# Altium PCB PCB1.PcbDoc
Units mm, origin at the board's own origin, x right, y up, seen from the top; angles counter-clockwise.
Board outline 100.08 x 99.57 mm, 2 copper layers (Top Layer, Bottom Layer); 120 components, 92 nets, 380 pads, 70 vias.
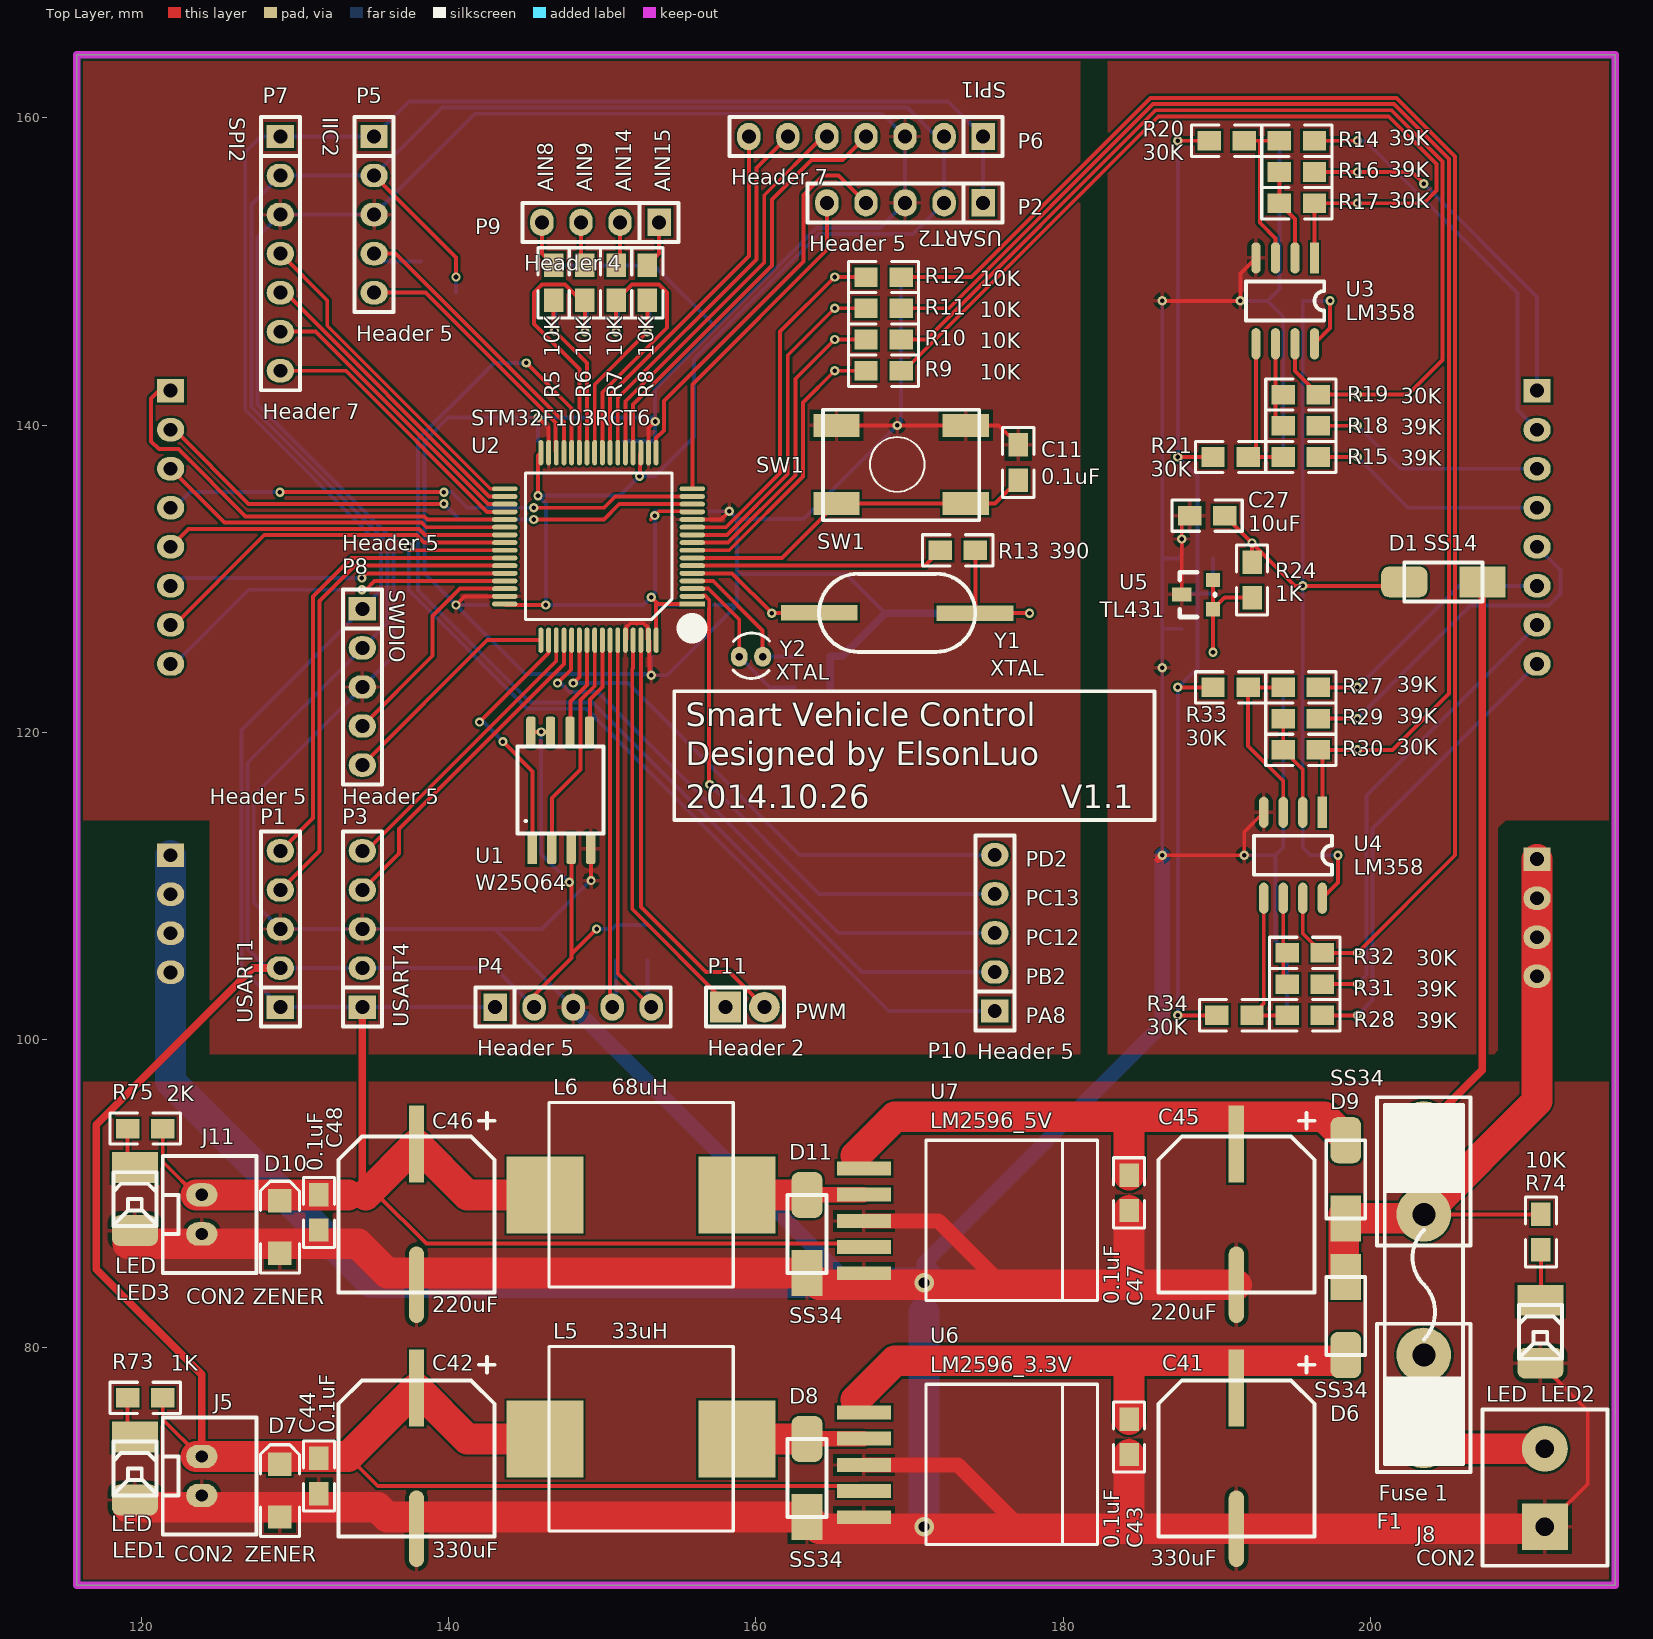
[diagram p0: Top Layer view]
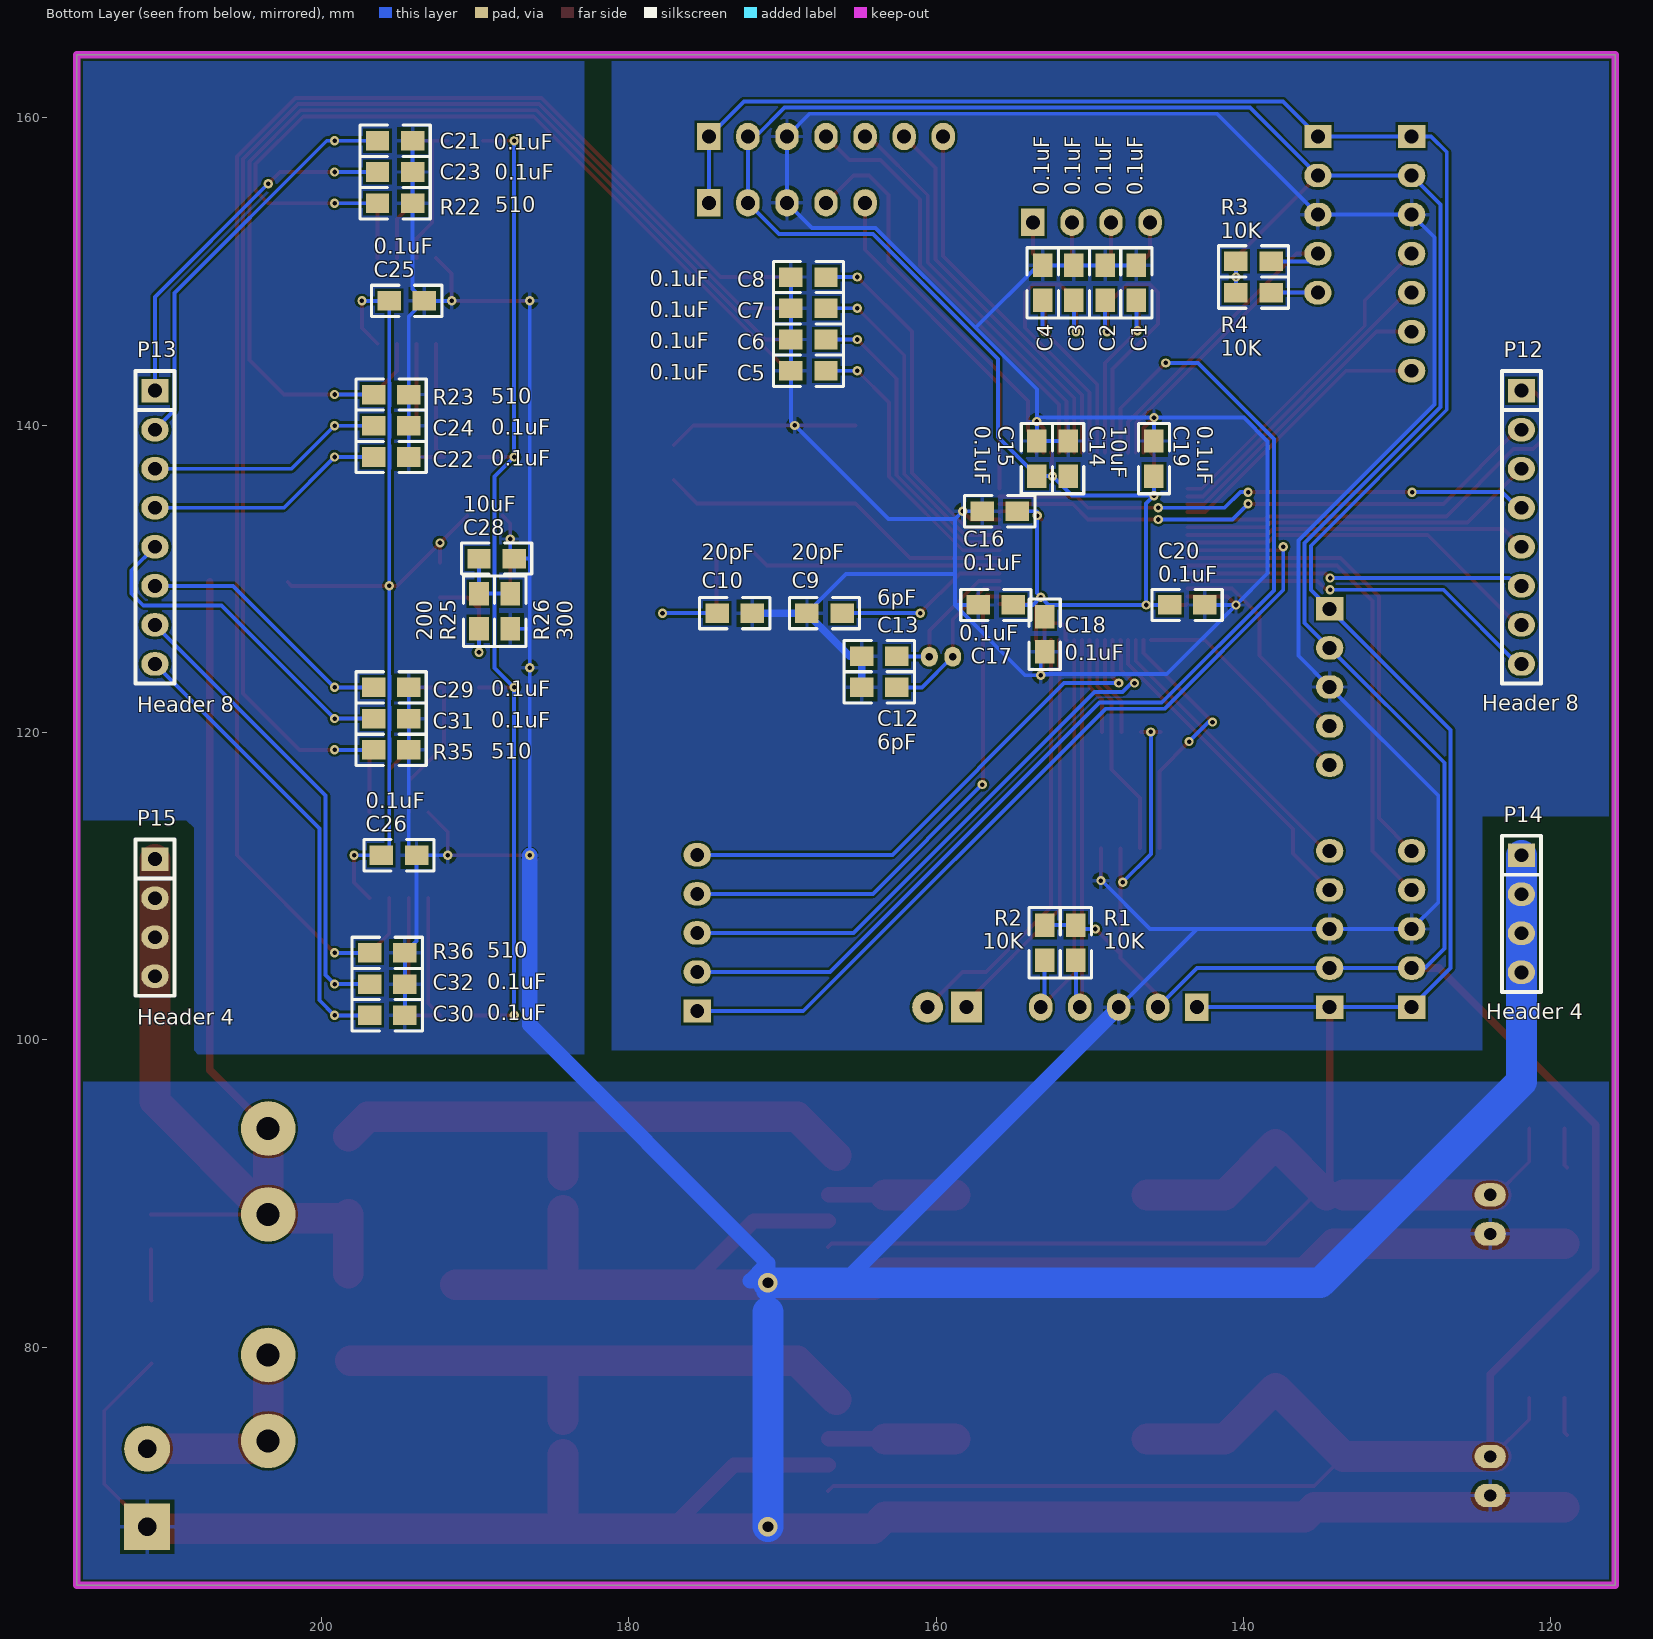
[diagram p1: Bottom Layer view, seen from below]
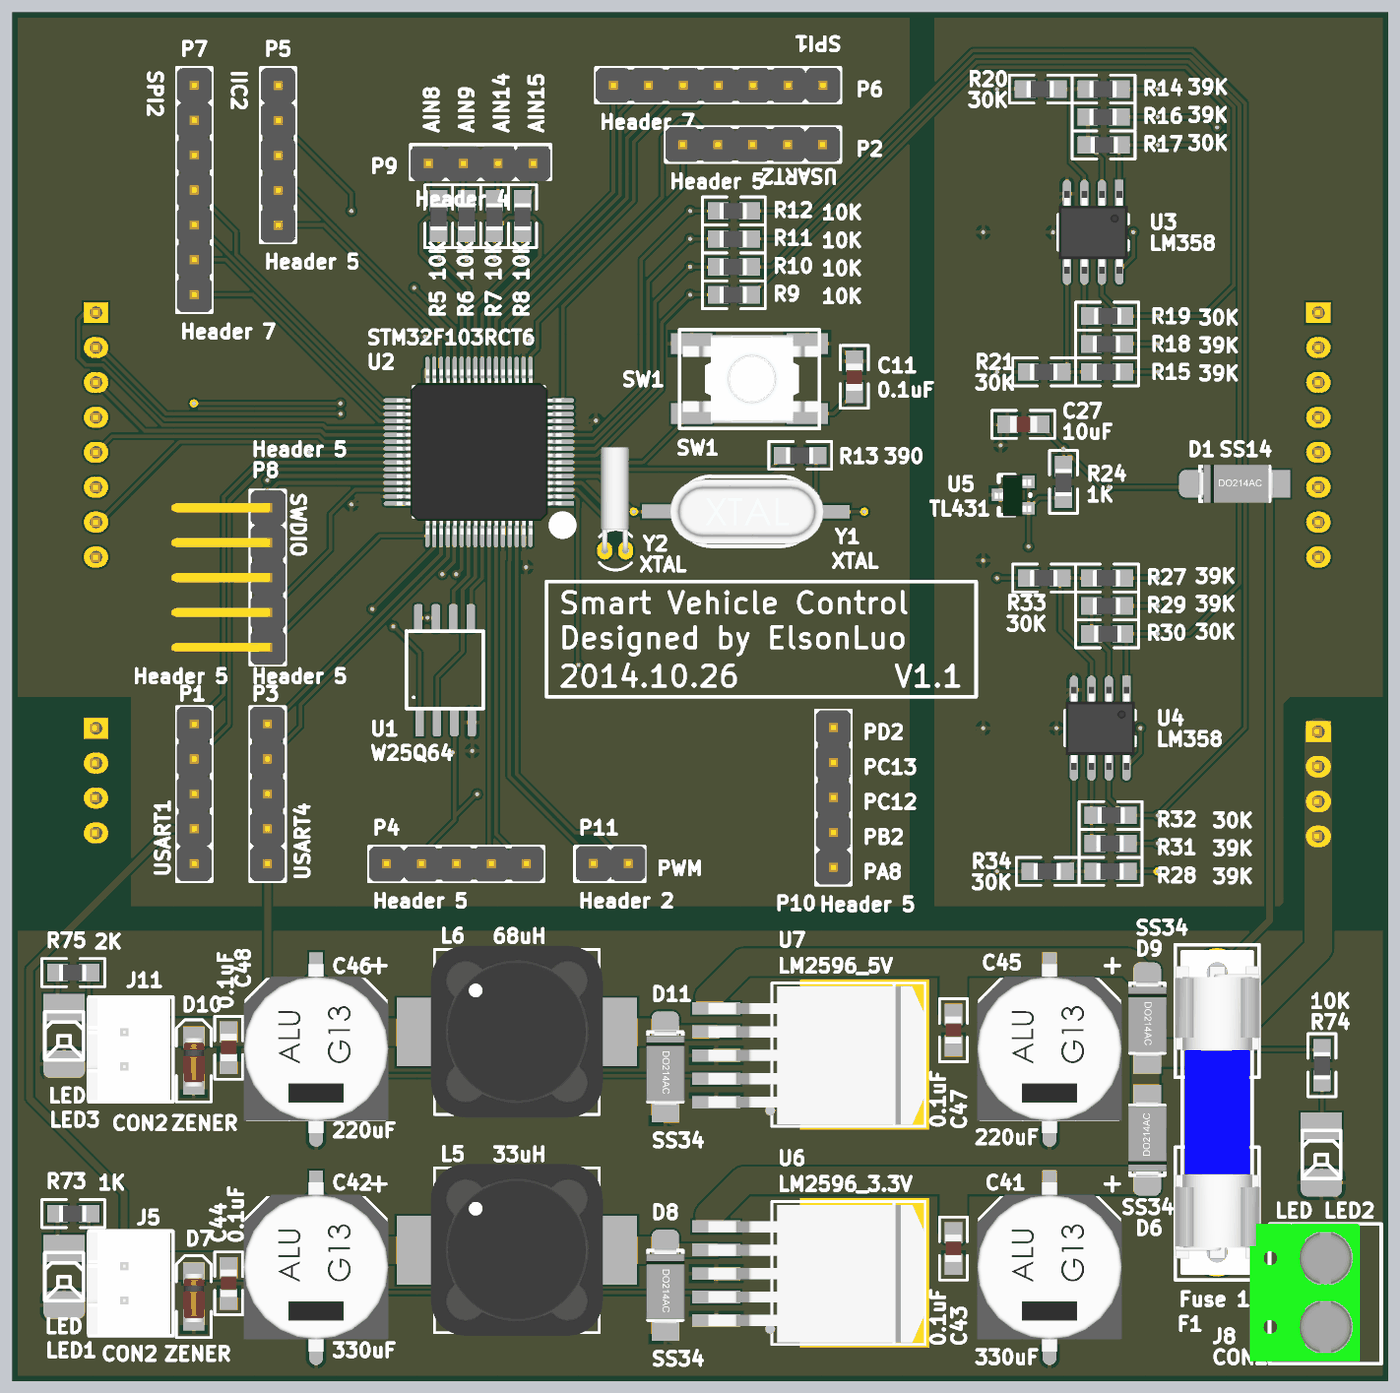
[diagram p2: 3D render of the assembled board from above, using the file's embedded part models]
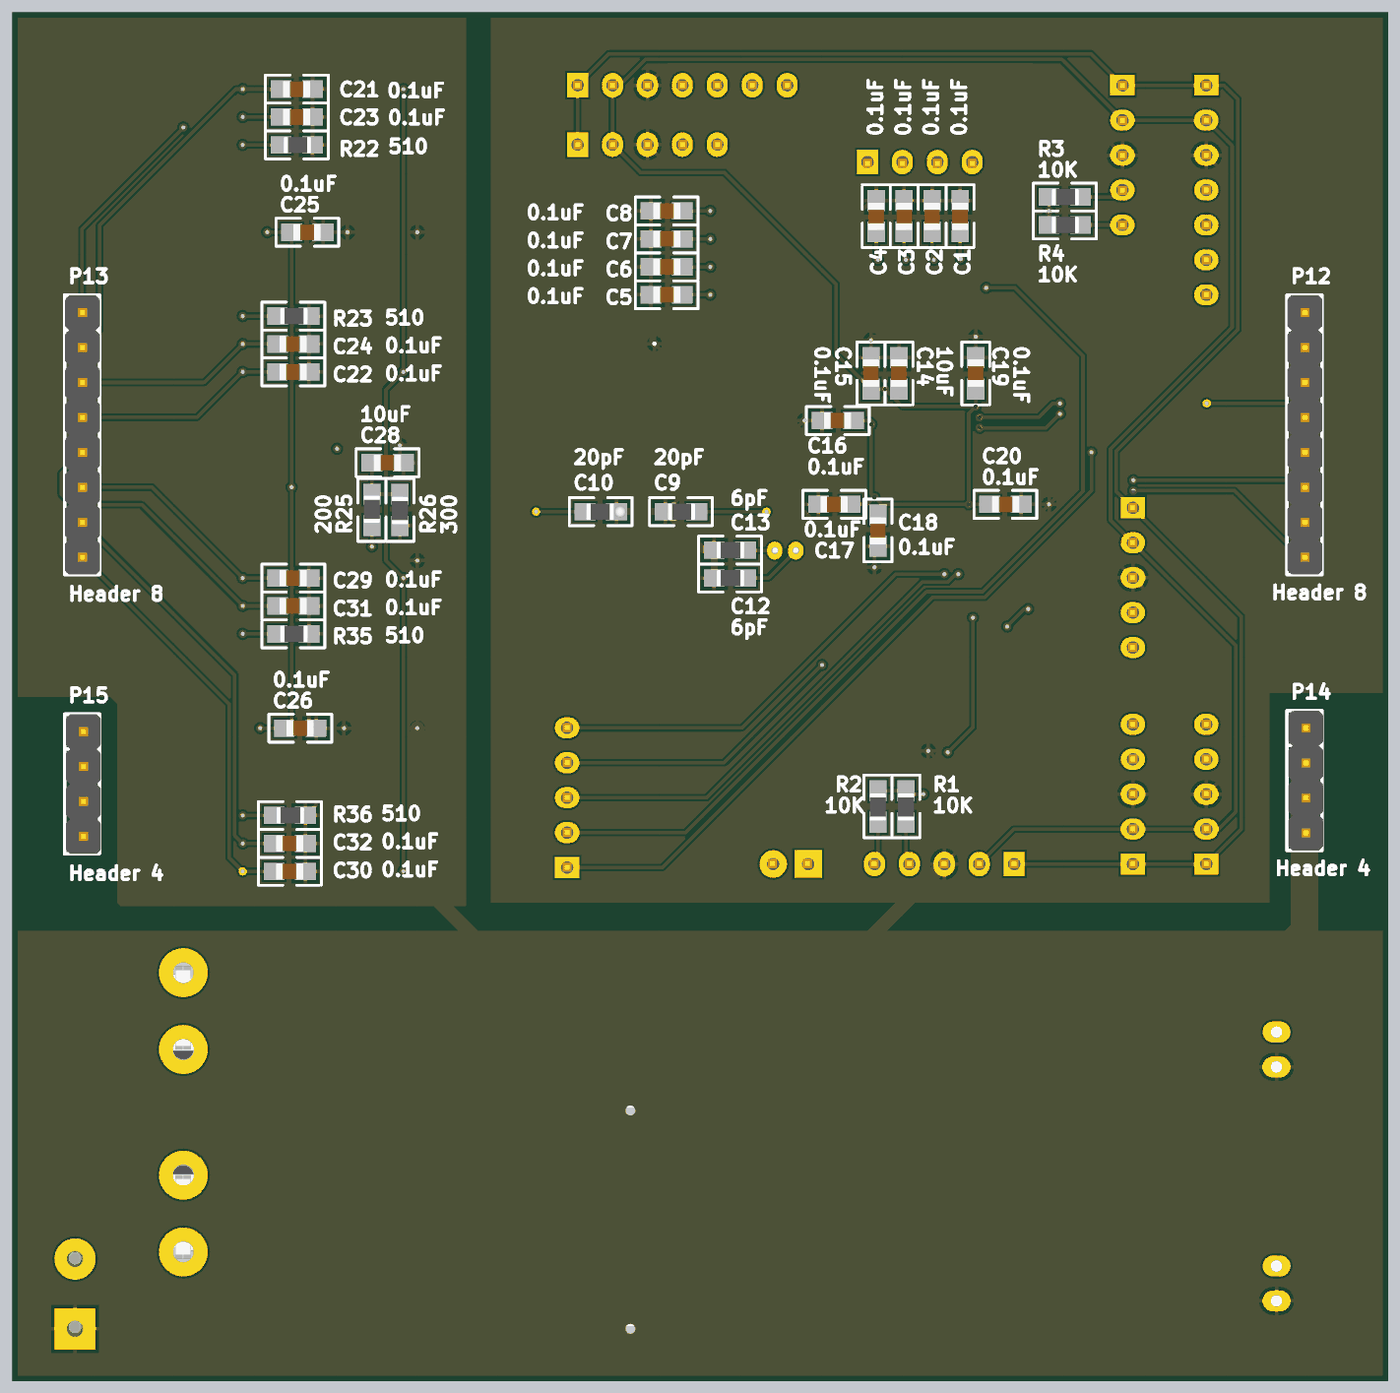
[diagram p3: 3D render of the assembled board from below, using the file's embedded part models]

## Layer stack, top to bottom
Top Solder: solder mask 0.0102, Solder Resist, Dk 3.5
Top Layer: signal copper 0.0356
Dielectric1: dielectric 0.32, FR-4, Dk 4.8
Bottom Layer: signal copper 0.0356
Bottom Solder: solder mask 0.0102, Solder Resist, Dk 3.5

## Board outline
115.824,64.516 215.9,64.516 215.9,164.084 115.824,164.084

## Design rules (kind name [scope] priority, off if disabled: settings)
Clearance [All] p1: gap=0.15
ComponentClearance [All] p1 off: gap=0.254 collisioncheckmode=3 verticalgap=0.254 showdistances=FALSE
PolygonConnect [All] p1: connectstyle=Relief reliefconductorwidth=0.254 reliefentries=4 polygonreliefangle="90 Angle" airgapwidth=0.254
RoomDefinition "power supply" [InComponentClass('power supply')] p1: confinementstyle=ConfineIn formatcopy=TRUE lockcomponents=FALSE outline 117.602,65.024 215.646,65.024 215.646,97.282 117.602,97.282
RoomDefinition mcu [InComponentClass('mcu')] p2: confinementstyle=ConfineIn formatcopy=TRUE lockcomponents=FALSE outline 179.354,162.077 117.602,162.077 117.602,99.085 179.354,99.085
RoomDefinition analog [InComponentClass('analog')] p3: confinementstyle=ConfineIn formatcopy=TRUE lockcomponents=FALSE outline 185.166,160.782 185.166,99.06 213.868,99.06 213.868,160.782
RoutingVias [All] p1: holewidth=0.3 width=0.6 viastyle="Through Hole" minholewidth=0.3 minwidth=0.6 maxholewidth=0.3 maxwidth=0.6
SMDNeckDown [All] p1 off: percent=80.000
SilkToSolderMaskClearance SilkscreenOverComponentPads [IsPad] p1: minsilkscreentomaskgap=0.254 clearancetoexposedcopper=TRUE
SolderMaskExpansion [All] p1: expansion=0.02
Width Width_2 [InNet('GND')] p1: maxlimit=2 minlimit=0.254 preferedwidth=0.254
Width Width_1 [InNet('VCC')] p2: maxlimit=2 minlimit=0.254 preferedwidth=0.254
Width [All] p3: maxlimit=5 minlimit=0.15 preferedwidth=0.15
27 further rules are at their usual default settings.

## Classes and differential pairs
component class "power supply": C41 C42 C43 C44 C45 C46 C47 C48 D6 D7 D8 D9 D10 D11 F1 J5 J8 J11 L5 L6 LED1 LED2 LED3 R73 R74 R75 U6 U7
component class mcu: C1 C2 C3 C4 C5 C6 C7 C8 C9 C10 C11 C12 C13 C14 C15 C16 C17 C18 C19 C20 P1 P2 P3 P4 P5 P6 P7 P8 P9 P10 P11 P12 P14 R1 R2 R3 R4 R5 R6 R7 R8 R9 R10 R11 R12 R13 SW1 U1 U2 Y1 Y2
component class analog: C21 C22 C23 C24 C25 C26 C27 C28 C29 C30 C31 C32 D1 P13 P15 R14 R15 R16 R17 R18 R19 R20 R21 R22 R23 R24 R25 R26 R27 R28 R29 R30 R31 R32 R33 R34 R35 R36 U3 U4 U5

## Components (designator, comment, footprint, x,y, rotation, side; value= is the part's Value field where it differs from the comment)
C1 "0.1uF" "0805 CAP" 146.969,148.107 r90 bottom
C2 "0.1uF" "0805 CAP" 149.001,148.107 r90 bottom
C3 "0.1uF" "0805 CAP" 151.033,148.107 r90 bottom
C4 "0.1uF" "0805 CAP" 153.065,148.107 r90 bottom
C5 "0.1uF" "0805 CAP" 167.162,143.535 r0 bottom
C6 "0.1uF" "0805 CAP" 167.162,145.567 r0 bottom
C7 "0.1uF" "0805 CAP" 167.162,147.599 r0 bottom
C8 "0.1uF" "0805 CAP" 167.162,149.631 r0 bottom
C9 "20pF" 0805 166.116,127.762 r0 bottom
C10 "20pF" 0805 174.244,127.762 r180 bottom
C11 "0.1uF" "0805 CAP" 177.068,136.423 r90 top
C12 "6pF" 0805 162.56,122.936 r0 bottom
C13 "6pF" 0805 162.56,124.968 r0 bottom
C14 "10uF" "0805 CAP" 151.414,138.963 r270 bottom
C15 "0.1uF" "0805 CAP" 153.446,138.963 r270 bottom
C16 "0.1uF" "0805 CAP" 157.002,134.391 r180 bottom
C17 "0.1uF" "0805 CAP" 157.256,128.295 r180 bottom
C18 "0.1uF" "0805 CAP" 152.938,125.247 r90 bottom
C19 "0.1uF" "0805 CAP" 145.826,138.963 r270 bottom
C20 "0.1uF" "0805 CAP" 142.524,128.295 r0 bottom
C21 "0.1uF" "0805 CAP" 196.342,158.496 r180 bottom
C22 "0.1uF" "0805 CAP" 196.596,137.922 r180 bottom
C23 "0.1uF" "0805 CAP" 196.342,156.464 r180 bottom
C24 "0.1uF" "0805 CAP" 196.596,139.954 r180 bottom
C25 "0.1uF" "0805 CAP" 195.58,148.082 r180 bottom
C26 "0.1uF" "0805 CAP" 196.088,112.014 r180 bottom
C27 "10uF" "0805 CAP" 190.5,134.112 r180 top
C28 "10uF" "0805 CAP" 189.738,131.318 r180 bottom
C29 "0.1uF" "0805 CAP" 196.596,122.936 r180 bottom
C30 "0.1uF" "0805 CAP" 196.85,101.6 r180 bottom
C31 "0.1uF" "0805 CAP" 196.596,120.904 r180 bottom
C32 "0.1uF" "0805 CAP" 196.85,103.632 r180 bottom
C41 "330uF" "RVT 220uF" 191.262,72.771 r270 top
C42 "330uF" "RVT 220uF" 137.922,72.771 r270 top
C43 "0.1uF" "0805 CAP" 184.277,75.311 r270 top
C44 "0.1uF" "0805 CAP" 131.572,72.771 r270 top
C45 "220uF" "RVT 220uF" 191.262,88.646 r270 top
C46 "220uF" "RVT 220uF" 137.922,88.646 r270 top
C47 "0.1uF" "0805 CAP" 184.277,91.186 r270 top
C48 "0.1uF" "0805 CAP" 131.572,89.916 r270 top
D1 "SS14" DO-241AC 204.724,129.794 r180 top
D6 "SS34" DO-241AC 198.374,82.042 r270 top
D7 "ZENER" "1206 DIODE" 129.032,68.961 r90 top
D8 "SS34" DO-241AC 163.322,71.501 r90 top
D9 "SS34" DO-241AC 198.374,90.932 r90 top
D10 "ZENER" "1206 DIODE" 129.032,86.106 r90 top
D11 "SS34" DO-241AC 163.322,87.376 r90 top
F1 "Fuse 1" FUSE1 203.454,84.074 r90 top
J5 "CON2" DG1282 114.808,75.438 r270 top
J8 "CON2" con2 211.328,70.866 r90 top
J11 "CON2" DG1282 114.808,92.456 r270 top
L5 "33uH" 12x12 152.527,74.041 r0 top
L6 "68uH" 12x12 152.527,89.916 r0 top
LED1 "LED" "3528 led" 120.396,70.866 r180 top
LED2 "LED" "3528 LED" 211.836,79.756 r180 top
LED3 "LED" "3528 led" 120.396,88.392 r180 top
P1 "Header 5" "sip5 i" 129.062,102.133 r90 top
P2 "Header 5" "sip5 i" 174.782,154.457 r180 top
P3 "Header 5" "sip5 i" 134.396,102.133 r90 top
P4 "Header 5" "sip5 i" 143.032,102.133 r0 top
P5 "Header 5" "sip5 i" 135.158,158.775 r270 top
P6 "Header 7" "sip7 i" 174.782,158.775 r180 top
P7 "Header 7" "sip7 i" 129.062,158.775 r270 top
P8 "Header 5" "sip5 l" 134.396,128.041 r270 top
P9 "Header 4" "sip4 i" 149.89,153.187 r180 top
P10 "Header 5" "sip5 i" 175.544,101.879 r90 top
P11 "Header 2" "sip2 i" 159.288,102.133 r0 top
P12 "Header 8" "sip8 i" 121.92,142.24 r270 bottom
P13 "Header 8" "sip8 i" 210.82,142.24 r270 bottom
P14 "Header 4" "sip4 i" 121.92,108.204 r270 bottom
P15 "Header 4" "sip4 i" 210.82,107.95 r270 bottom
R1 "10K" 0805 150.906,105.181 r90 bottom
R2 "10K" 0805 152.938,105.181 r90 bottom
R3 "10K" 0805 138.206,150.647 r0 bottom
R4 "10K" 0805 138.206,148.615 r0 bottom
R5 "10K" 0805 146.842,148.107 r90 top
R6 "10K" 0805 148.874,148.107 r90 top
R7 "10K" 0805 150.906,148.107 r90 top
R8 "10K" 0805 152.938,148.107 r90 top
R9 "10K" 0805 167.162,143.535 r0 top
R10 "10K" 0805 167.162,145.567 r0 top
R11 "10K" 0805 167.162,147.599 r0 top
R12 "10K" 0805 167.162,149.631 r0 top
R13 "390" 0805 171.988,131.851 r0 top
R14 "39K" 0805 194.056,158.496 r0 top
R15 "39K" 0805 194.31,137.922 r0 top
R16 "39K" 0805 194.056,156.464 r0 top
R17 "30K" 0805 196.342,154.432 r180 top
R18 "39K" 0805 194.31,139.954 r0 top
R19 "30K" 0805 196.596,141.986 r180 top
R20 "30K" 0805 189.484,158.496 r0 top
R21 "30K" 0805 189.738,137.922 r0 top
R22 "510" 0805 194.056,154.432 r0 bottom
R23 "510" 0805 194.31,141.986 r0 bottom
R24 "1K" 0805 192.278,128.778 r90 top
R25 "200" 0805 189.738,129.032 r270 bottom
R26 "300" 0805 187.706,126.746 r90 bottom
R27 "39K" 0805 194.31,122.936 r0 top
R28 "39K" 0805 194.564,101.6 r0 top
R29 "39K" 0805 194.31,120.904 r0 top
R30 "30K" 0805 196.596,118.872 r180 top
R31 "39K" 0805 194.564,103.632 r0 top
R32 "30K" 0805 196.85,105.664 r180 top
R33 "30K" 0805 189.738,122.936 r0 top
R34 "30K" 0805 189.992,101.6 r0 top
R35 "510" 0805 194.31,118.872 r0 bottom
R36 "510" 0805 194.564,105.664 r0 bottom
R73 "1K" 0805 119.126,76.708 r0 top
R74 "10K" 0805 211.074,86.36 r90 top
R75 "2K" 0805 119.126,94.234 r0 top
SW1 "SW1" "KEYA SMT" 174.02,133.883 r180 top
U1 "W25Q64" "so-8 fat" 147.066,113.03 r0 top
U2 "STM32F103RCT6" qfp64 149.763,132.105 r180 top
U3 "LM358" so-8 196.342,150.876 r270 top
U4 "LM358" so-8 196.85,114.808 r270 top
U5 "TL431" sot-23 187.706,129.032 r90 top
U6 "LM2596_3.3V" to-263-5 177.927,74.041 r270 top
U7 "LM2596_5V" to-263-5 177.927,89.916 r270 top
Y1 "XTAL" "XTAL SOT" 169.194,127.787 r0 top
Y2 "XTAL" "xtal 26" 159.766,124.206 r270 top

## Footprints (in the part's own frame and the unit in brackets; to place one, negate y for a bottom-side part, rotate by r counter-clockwise, add the part's x,y. Pads: shape width x height; smd on the part's side, far side on the other; paste and mask are expansions set on the pad)
12x12 [mm]
  rect 5x5 smd: 1(-6.25,0) 2(6.25,0)
  silkscreen extent -6,-6 6,6, body extent -6.25,-6.22 6.25,6.28, height 6.7
0805 [mil]
  rect 60x50 smd: 1(0,0) 2(90,0)
  silkscreen extent -45,-40 135,40, body extent 4,-24 83,24, height 20
"0805 CAP" [mil]
  rect 60x50 smd: 1(0,0) 2(90,0)
  silkscreen extent -45,-40 135,40, body extent 5,-24 84,24, height 37
"1206 DIODE" [mil]
  rect 60x60 smd: 1(0,0) 2(135,0)
  silkscreen extent -50,-50 185,50, body extent -6,-30 132,30, height 59
"3528 led" [mm]
  rect 3x2 smd paste+0: 1(0.8,-3.3)
  rrect50% 3x2 smd: 2(0.8,0.8)
  silkscreen extent -0.6,-3 2.2,0.5, body extent -0.7,-3.1 2.3,0.6, height 2.1
"3528 LED" [mm]
  rect 3x2 smd paste+0: 1(0.8,-3.3)
  rrect50% 3x2 smd: 2(0.8,0.8)
  silkscreen extent -0.6,-3 2.2,0.5, body extent -0.7,-3.1 2.3,0.6, height 2.1
con2 [mm]
  rect 3x3 hole 1.2: 1(-2.54,0)
  round 3 hole 1.2: 2(2.54,0)
  silkscreen extent -5.08,-4.06 5.08,4.06, body extent -4.9,-2.5 5.1,5.5, height 11
DG1282 [mil]
  oval 60x80 hole 31.5: 1(100,360) 2(200,360)
  silkscreen extent 0,260 300,500, body extent 4,253 295,493, height 283
DO-241AC [mm]
  rect 3x2 smd: 1(-2.54,0)
  rrect50% 3x2 smd: 2(2.54,0)
  silkscreen extent -2.54,-1.27 2.54,1.27, body extent -2.84,-1.4 2.64,1.4, height 2.24
FUSE1 [mil]
  round 140 hole 59.06: 1(-400,0) 1(-180,0) 2(180,0) 2(400,0)
  silkscreen extent -480,-120 480,120, body extent -419,-123 419,121, height 397
"KEYA SMT" [mm]
  rect 3x1.5 smd: 1(0.366,-1.016) 1(8.778,-1.016) 2(0.366,-6.096) 2(8.778,-6.096)
  silkscreen extent -0.51,-7.11 9.65,0.08, body extent -0.62,-6.7 9.42,-0.36, height 5.5
qfp64 [mm]
  rect 1.651x0.32 smd: 1(-6.1,3.75)
  oval 1.651x0.32 smd: 2(-6.1,3.25) 3(-6.1,2.75) 4(-6.1,2.25) 5(-6.1,1.75) 6(-6.1,1.25) 7(-6.1,0.75) 8(-6.1,0.25) 9(-6.1,-0.25) 10(-6.1,-0.75) 11(-6.1,-1.25) 12(-6.1,-1.75) 13(-6.1,-2.25) 14(-6.1,-2.75) 15(-6.1,-3.25) 16(-6.1,-3.75) 33(6.1,-3.75) 34(6.1,-3.25) 35(6.1,-2.75) 36(6.1,-2.25) 37(6.1,-1.75) 38(6.1,-1.25) 39(6.1,-0.75) 40(6.1,-0.25) 41(6.1,0.25) 42(6.1,0.75) 43(6.1,1.25) 44(6.1,1.75) 45(6.1,2.25) 46(6.1,2.75) 47(6.1,3.25) 48(6.1,3.75)
  oval 0.32x1.651 smd: 17(-3.75,-6.1) 18(-3.25,-6.1) 19(-2.75,-6.1) 20(-2.25,-6.1) 21(-1.75,-6.1) 22(-1.25,-6.1) 23(-0.75,-6.1) 24(-0.25,-6.1) 25(0.25,-6.1) 26(0.75,-6.1) 27(1.25,-6.1) 28(1.75,-6.1) 29(2.25,-6.1) 30(2.75,-6.1) 31(3.25,-6.1) 32(3.75,-6.1) 49(3.75,6.1) 50(3.25,6.1) 51(2.75,6.1) 52(2.25,6.1) 53(1.75,6.1) 54(1.25,6.1) 55(0.75,6.1) 56(0.25,6.1) 57(-0.25,6.1) 58(-0.75,6.1) 59(-1.25,6.1) 60(-1.75,6.1) 61(-2.25,6.1) 62(-2.75,6.1) 63(-3.25,6.1) 64(-3.75,6.1)
  silkscreen extent -6.1,-4.77 4.76,5.33, body extent -6.02,-6 5.98,6, height 1.6
"RVT 220uF" [mm]
  rect 5x1 smd: 1(-4.572,0)
  oval 5x1 smd: 2(4.572,0)
  silkscreen extent -6.6,-5.08 5.08,5.08, body extent -6.2,-5.25 6.1,5.25, height 14
"sip2 i" [mm]
  rect 2x2 hole 0.9: 1(-1.27,0)
  round 2 hole 0.9: 2(1.27,0)
  silkscreen extent -2.54,-1.27 2.54,1.27, body extent -2.48,-1.23 2.6,1.31, height 10.1
"sip4 i" [mil]
  rect 60x70 hole 35.43: 1(-150,0)
  oval 60x70 hole 35.43: 2(-50,0) 3(50,0) 4(150,0)
  silkscreen extent -200,-50 200,50, body extent -200,-46 200,54, height 398
"sip5 i" [mil]
  rect 60x70 hole 35.43: 1(0,0)
  oval 60x70 hole 35.43: 2(100,0) 3(200,0) 4(300,0) 5(400,0)
  silkscreen extent -50,-50 450,50, body extent -49,-50 451,50, height 398
"sip5 l" [mil]
  rect 60x70 hole 35.43: 1(0,0)
  oval 60x70 hole 35.43: 2(100,0) 3(200,0) 4(300,0) 5(400,0)
  silkscreen extent -50,-50 450,50, body extent -50,-274 450,51, height 170
"sip7 i" [mil]
  rect 60x70 hole 35.43: 1(0,0)
  oval 60x70 hole 35.43: 2(100,0) 3(200,0) 4(300,0) 5(400,0) 6(500,0) 7(600,0)
  silkscreen extent -50,-50 650,50, body extent -50,-50 650,50, height 398
"sip8 i" [mil]
  rect 60x70 hole 35.43: 1(0,0)
  oval 60x70 hole 35.43: 2(100,0) 3(200,0) 4(300,0) 5(400,0) 6(500,0) 7(600,0) 8(700,0)
  silkscreen extent -50,-50 750,50, body extent -50,-49 750,51, height 398
so-8 [mil]
  rect 80x24 smd: 1(0,0)
  oval 80x24 smd: 2(0,-50) 3(0,-100) 4(0,-150) 5(220,-150) 6(220,-100) 7(220,-50) 8(220,0)
  silkscreen extent 60,-175 160,25, body extent -9,-174 229,24, height 63
"so-8 fat" [mil]
  rect 24.02x80 smd: 1(-64,-23)
  rrect50% 24.02x80 smd: 2(-14,-23) 3(36,-23) 4(86,-23) 5(83,275) 6(33,275) 7(-17,275) 8(-67,275)
  silkscreen extent -101,16 119,239, body extent -102,12 122,240, height 39
sot-23 [mil]
  rect 36x36 smd: 1(-40,-80) 2(35,-80)
  rect 36x50 smd: 3(-2,0)
  silkscreen extent -60,-85 55,5, body extent -63,-87 55,17, height 43
to-263-5 [mm]
  rect 0.9x3.5 smd: 1(-1.725,-10.9) 2(-0.025,-10.9) 3(1.7,-10.9) 4(3.4,-10.9) 5(5.1,-10.9)
  silkscreen extent -3.56,-6.86 6.86,4.3, body extent -3.3,-11.46 6.7,4.21, height 4.78
"xtal 26" [mm] "Crystal, Thru-Hole; 2 Leads; Body 3.1 x 8.2 mm (Dia.xH)"
  oval 1.3x1.1 hole 0.5: 1(-0.725,0.675) 2(-0.725,-0.85)
  silkscreen extent -2.27,-1.25 0.69,1.12, body extent -8.25,-1.1 -0.55,0.9, height 2
"XTAL SOT" [mm]
  rect 5x1 smd: 1(-5.075,0) 2(5.05,-0.025)
  silkscreen extent -5.08,-2.55 5.08,2.54, body extent -5.53,-2.37 5.65,2.33, height 4.68

## Part data
C1 C2 C3 C4 C5 C6 C7 C8 C9 C10 C11 C12 C13 C14 C15 C16 C17 C18 C19 C20 C21 C22 C23 C24 C25 C26 C27 C28 C29 C30 C31 C32 C43 C44 C47 C48: library part CAP
C41 C42 C45 C46: library part "Electrolytic CAP"
D1: "Diode"
D6 D8 D9 D11: library part SS14, "Diode"
F1: "Fuse"
L5 L6: library part Inductance
P1 P2 P3 P4 P5 P8 P10: "Header, 5-Pin"
P6 P7: "Header, 7-Pin"
P9 P14 P15: "Header, 4-Pin"
P11: "Header, 2-Pin"
P12 P13: "Header, 8-Pin"
R1 R2 R3 R4 R5 R6 R7 R8 R9 R10 R11 R12 R13 R14 R15 R16 R17 R18 R19 R20 R21 R22 R23 R24 R25 R26 R27 R28 R29 R30 R31 R32 R33 R34 R35 R36 R73 R74 R75: library part RES, "RES"
U2: "STM32 ARM-based 32-bit MCU Performance Line with 256 kB Flash, 48 kB Internal RAM, -40 to +85癈 Temperature, 64-Pin LQFP, Tray"
U5: "IC"
U6 U7: library part LM2596, "IC-power"
Y1 Y2: "Crystal Oscillator"

## Via types
v1: diameter 0.6, hole 0.3, Top Layer to Bottom Layer, tented both sides, 64 vias
v2: diameter 0.6, hole 0.3, Top Layer to Bottom Layer, 4 vias
v3: diameter 1.27, hole 0.711, Top Layer to Bottom Layer, tented both sides, 2 vias

## Nets (pads, with @x,y where several pads share a name; then routed paths per layer and width w, separated by ;. In a path a pad name is that pad's centre, name@x,y a point inside that pad or via, vN(x,y) a via of type N, cw(c..) or ccw(c..) an arc to the next point about the centre after c; other vN are vias at no path point)
AIN8: C1.1 R5.1 U2.26 | length 13.1
  Top Layer w0.254: R5.1@147.085,148.107 R5.1 146.842,146.202 v1(146.905,146.139) 149.013,144.031 U2.26
  Bottom Layer w0.254: v1@146.842,146.075 v1(146.905,146.139) 146.969,146.202 C1.1
AIN9: C2.1 R6.1 U2.27 | length 19.7
  Top Layer w0.254: U2.27 148.513,143.642 145.572,146.583 145.572,148.615 145.93,148.973 145.93,148.984 146.092,149.146 147.592,149.146 148.631,148.107 R6.1 v1(148.874,146.075)
  Bottom Layer w0.254: v1(148.874,146.075) 149.001,146.202 C2.1
AIN10: C5.1 R9.1 U2.8 | length 21
  Top Layer w0.254: U2.8 158.266,131.855 163.074,136.663 163.074,141.479 v1(165.13,143.535) R9.1
  Bottom Layer w0.254: v1(165.13,143.535) C5.1
AIN11: C6.1 R10.1 U2.9 | length 22.5
  Top Layer w0.254: U2.9 158.195,132.355 162.574,136.734 162.574,143.011 v1(165.13,145.567) R10.1
  Bottom Layer w0.254: v1(165.13,145.567) C6.1
AIN12: C7.1 R11.1 U2.10 | length 24
  Top Layer w0.254: U2.10 158.123,132.855 162.074,136.806 162.074,144.543 v1(165.13,147.599) R11.1
  Bottom Layer w0.254: v1(165.13,147.599) C7.1
AIN13: C8.1 R12.1 U2.11 | length 25.5
  Top Layer w0.254: U2.11 158.052,133.355 161.574,136.877 161.574,146.075 v1(165.13,149.631) R12.1
  Bottom Layer w0.254: v1(165.13,149.631) C8.1
AIN14: C3.1 R7.1 U2.24 | length 20.2
  Top Layer w0.254: U2.24 150.013,142.134 154.208,146.329 154.208,148.615 153.85,148.973 153.85,148.984 153.688,149.146 151.945,149.146 R7.1 v1(150.906,146.075)
  Bottom Layer w0.254: v1(150.906,146.075) 151.033,146.202 C3.1
AIN15: C4.1 R8.1 U2.25 | length 13.2
  Top Layer w0.254: U2.25 149.513,142.65 v1(152.938,146.075) R8.1
  Bottom Layer w0.254: v1@153.065,146.202 C4.1
G_A0: P12.2 U2.14 | length 36.5
  Top Layer w0.254: P12.2@122.174,139.7 127,134.874 v1(139.7,134.874) ; v1(145.542,133.858) 150.114,133.858 151.111,134.855 U2.14
  Bottom Layer w0.254: v1(139.7,134.874) 140.716,133.858 v1(145.542,133.858)
G_A1: P12.4 U2.15 | length 35
  Top Layer w0.254: v2(129.032,135.636) v1(139.7,135.636) ; v1(145.542,134.62) 150.114,134.62 150.849,135.355 U2.15
  Bottom Layer w0.254: P12.4@122.047,134.493 123.19,135.636 v2(129.032,135.636) ; v1(139.7,135.636) 140.208,135.636 141.224,134.62 v1(145.542,134.62)
G_A8: P10.1 U2.41 | length 58.5
  Top Layer w0.254: v1@137.414,131.855 U2.41
  Bottom Layer w0.254: v1(137.414,132.08) 137.414,130.805 137.414,129.278 145.151,121.541 148.978,121.541 168.64,101.879 P10.1
G_A11: P12.6 U2.44 | length 22.2
  Top Layer w0.254: v1(134.366,130.048) 134.673,130.355 U2.44
  Bottom Layer w0.254: P12.6@121.92,129.286 122.682,130.048 v1(134.366,130.048)
G_A12: P12.8 U2.45 | length 23.6
  Top Layer w0.254: v1@134.62,129.286 135.189,129.855 U2.45
  Bottom Layer w0.254: P12.8@122.047,124.333 127,129.286 v1(134.366,129.286)
G_B2: P10.2 U2.28 | length 73.8
  Top Layer w0.254: v1(145.064,144.043) 148.013,141.094 U2.28
  Bottom Layer w0.254: v1(145.064,144.043) 142.964,144.043 138.026,139.105 138.026,129.237 145.318,121.945 149.382,121.945 166.908,104.419 P10.2
G_C12: P10.3 U2.53 | length 38.4
  Top Layer w0.254: v1(147.096,123.215) 147.962,124.081 147.962,125.954 U2.53
  Bottom Layer w0.254: v1(147.096,123.215) 147.296,123.215 147.873,122.638 149.705,122.638 165.384,106.959 P10.3
G_C13: P10.4 U2.2 | length 34.8
  Top Layer w0.254: U2.2 156.494,128.855 156.557,128.918 156.677,128.918 156.965,128.63 156.965,128.08 156.95,128.065 156.95,116.663 v1(157.002,116.611)
  Bottom Layer w0.254: v1(157.002,116.611) 164.114,109.499 P10.4
G_D2: P10.5 U2.54 | length 35
  Top Layer w0.254: v1(148.112,123.215) 148.513,123.616 U2.54
  Bottom Layer w0.254: v1(148.112,123.215) 151.668,123.215 162.844,112.039 P10.5
GND: C1.2 C2.2 C3.2 C4.2 C5.2 C6.2 C7.2 C8.2 C9.2 C10.2 C11.2 C12.2 C13.2 C14.1 C15.1 C16.1 C17.1 C18.1 C19.1 C20.1 C21.2 C22.2 C23.2 C24.2 C25.2 C26.2 C27.2 C28.2 C29.2 C30.2 C31.2 C32.2 C41.2 C42.2 C43.2 C44.2 C45.2 C46.2 C47.2 C48.2 D7.1 D8.1 D10.1 D11.1 J5.2 J8.1 J11.2 LED1.2 LED2.2 LED3.2 P1.3 P2.3 P3.3 P4.3 P5.3 P6.3 P7.3 P8.3 P14.1 P14.2 P14.3 P14.4 R22.1 R23.1 R26.1 R35.1 R36.1 SW1.2 U1.4 U2.12 U2.18 U2.31 U2.47 U2.60 U2.63 U3.4 U4.4 U5.3 U6.3 U6.5 U7.3 U7.5 | length 782.8
  Top Layer w0.254: v1(140.492,128.295) 141.052,128.855 U2.47 ; v1(145.826,140.487) 146.513,139.8 U2.31 ; U1.4@149.28,112.471 v1(149.28,110.363) v1@149.382,110.261 ; U2.60 151.576,126.068 151.576,126.852 151.832,127.108 152.694,127.108 152.95,126.852 152.95,126.068 U2.63 153.076,125.942 v1@153.076,123.861 ; U2.18 153.013,139.8 v1(153.446,140.233) ; U2.12 157.736,133.855 v1(158.272,134.391) ; SW1.2@165.242,139.979 173.654,139.979 175.798,139.979 C11.2 ; v1(186.436,112.014) v1(191.77,112.014) 191.77,113.538 U4.4 ; v1(186.436,148.082) v1(191.516,148.082) 191.516,149.86 U3.4 ; U5.3 v1(187.706,132.588) 187.706,133.604 C27.2 ; LED2.2 214.122,75.87 214.122,71.12 J8.1@211.963,68.961
  Top Layer w0.5: 186.182,111.76 v1(186.436,112.014)
  Top Layer w1: U6.3 173.15,72.341 177.292,68.199 ; U7.3 171.88,88.216 176.022,84.074
  Top Layer w2: LED1.2@119.126,69.596 135.382,69.596 136.017,68.961 D8.1 164.084,68.199 177.292,68.199 184.277,68.199 ; LED3.2@119.126,86.741 134.112,86.741 136.017,84.836 D11.1 164.084,84.074 176.022,84.074 184.277,84.074 ; C43.2 184.277,68.199 ; C47.2 184.277,84.074 ; C45.2 184.277,84.074 ; J8.1@211.201,68.199 C41.2 184.277,68.199
  Bottom Layer w0.254: C20.1 v1(140.492,128.295) ; C19.1 v1(145.826,140.487) ; C1.2 C2.2 C3.2 C4.2 153.383,150.393 157.447,146.329 ; P4.3 143.032,107.213 ; v1@149.382,110.515 146.08,107.213 143.032,107.213 ; C14.1 C15.1 v1(153.446,140.233) 153.446,142.328 157.447,146.329 ; C18.1@153.192,124.993 v1(153.192,123.723) ; v1@153.446,140.487 v1(145.826,140.487) ; C16.1 v1(158.272,134.391) 158.78,133.883 ; C17.1 158.78,128.295 ; 158.802,131.321 158.78,131.343 ; C9.2 165.862,130.302 158.78,130.302 ; C8.2 C7.2 C6.2 C5.2 169.448,140.233 163.098,133.883 158.78,133.883 ; v1(186.436,112.014) v1(186.436,124.206) 186.436,126.746 ; v1(186.436,148.082) 186.436,131.318 ; R26.1 186.436,126.746 ; v1(187.706,132.588) 187.706,131.572 C28.2 186.436,131.318 ; v1(191.516,148.082) C25.2 ; v1(191.77,112.014) C26.2 ; C21.2 C23.2 R22.1 194.056,148.844 C25.2 ; C29.2 C31.2 R35.1 194.31,112.522 C26.2 ; C22.2 C24.2 R23.1 194.31,147.066 C25.2 ; C30.2 C32.2 R36.1 193.802,106.426 C26.2 ; v1(140.492,128.295) 138.43,130.357 138.43,138.938 139.979,140.487 v1(145.826,140.487) ; v1(140.492,128.295) 144.995,123.792 153.123,123.792 v1(153.192,123.723) ; 143.032,107.213 P3.3 P1.3 127.33,108.945 127.33,115.895 P8.3 136.428,124.993 136.428,132.486 127.584,141.33 127.584,152.217 P7.3 P5.3 141.716,160.253 168.224,160.253 P6.3 P2.3 168.074,152.829 163.947,152.829 157.447,146.329 ; v1(153.192,123.723) 154.208,123.723 158.78,128.295 ; 158.78,128.295 158.78,130.302 ; 158.78,130.302 158.78,131.343 ; 158.78,131.343 158.78,133.883 ; 186.436,126.746 186.436,131.318
  Bottom Layer w0.5: C12.2 C13.2 165.608,124.968 C9.2 C10.2
  Bottom Layer w1: P4.3 165.917,84.328 v3@170.942,84.328 ; 170.942,82.296 v3(170.942,84.201) v3@170.942,84.328 ; 171.196,83.566 v3@171.196,84.328 ; v1(186.436,112.014) 186.436,100.965 171.196,85.725 171.196,85.217 ; v3@170.942,84.328 170.942,85.471 171.196,85.217 ; v3@170.942,84.328 v3@171.196,84.328 ; v3@171.196,84.328 171.196,85.217 ; v3@171.196,84.328 172.085,84.328 171.196,85.217
  Bottom Layer w2: P14.1 P14.2 P14.3 P14.4 121.92,97.282 135.001,84.201 v3(170.942,84.201) ; v3(170.942,68.326) 170.942,82.296
  other v1: 169.194,139.979
I2C1_SCL: P4.4 R1.1 U2.58 | length 27.1
  Top Layer w0.254: U2.58 150.513,102.272 P4.4
  Bottom Layer w0.254: P4.4 150.906,102.387 R1.1
I2C1_SDA: P4.5 R2.1 U2.59 | length 27.9
  Top Layer w0.254: U2.59 151.013,104.312 P4.5
  Bottom Layer w0.254: R2.1 152.938,102.387 P4.5
I2C2_SCL: P5.4 R3.1 U2.29 | length 22.1
  Top Layer w0.254: P5.4 136.545,151.155 147.513,140.187 U2.29
  Bottom Layer w0.254: P5.4 135.666,150.647 R3.1
I2C2_SDA: P5.5 R4.1 U2.30 | length 20.3
  Top Layer w0.254: P5.5 138.514,148.615 146.95,140.179 146.95,138.268 U2.30
  Bottom Layer w0.254: P5.5 R4.1
"M1 CUR": C23.1 P13.1 R16.2 | length 26.7
  Top Layer w0.254: R16.2 v1(199.136,156.464) 202.692,156.464 v1(203.454,155.702)
  Bottom Layer w0.254: C23.1 v1(199.136,156.464) ; v1(203.454,155.702) 210.82,148.336 P13.1
"M1 PWM": P12.1 U2.37 | length 29.3
  Top Layer w0.254: P12.1@121.666,142.748 120.65,141.732 120.65,138.938 121.158,138.43 122.428,138.43 126.804,134.054 138.424,134.054 138.623,133.855 U2.37
"M1 S": R9.2 R17.1 R22.2 U3.1 | length 59.3
  Top Layer w0.254: R9.2 169.633,143.535 186.176,160.078 201.174,160.078 204.274,156.978 204.274,155.252 203.454,154.432 v1(199.136,154.432) R17.1 U3.1
  Bottom Layer w0.254: R22.2 v1(199.136,154.432)
"M1 VOL": C21.1 P13.2 R14.2 | length 29.5
  Top Layer w0.254: R14.2 v1(199.136,158.496)
  Bottom Layer w0.254: C21.1 v1(199.136,158.496) 199.644,158.496 209.55,148.59 209.55,140.97 P13.2
"M2 CUR": C24.1 P13.3 R18.2 | length 17.9
  Top Layer w0.254: R18.2 v1(199.136,139.954)
  Bottom Layer w0.254: C24.1 v1(199.136,139.954) 201.93,137.16 P13.3
"M2 PWM": P12.3 U2.38 | length 23.1
  Top Layer w0.254: P12.3@122.047,137.033 125.43,133.65 138.257,133.65 138.552,133.355 U2.38
"M2 S": R10.2 R19.1 R23.2 U3.7 | length 71.2
  Top Layer w0.254: R10.2 171.094,145.567 186.009,160.482 201.341,160.482 204.678,157.145 204.678,144.226 202.438,141.986 v1(199.136,141.986) R19.1 195.072,143.51 U3.7
  Bottom Layer w0.254: R23.2 v1(199.136,141.986)
"M2 VOL": C22.1 P13.4 R15.2 | length 18.1
  Top Layer w0.254: R15.2 v1(199.136,137.922)
  Bottom Layer w0.254: C22.1 v1(199.136,137.922) 202.438,134.62 P13.4
"M3 CUR": C31.1 P13.5 R29.2 | length 25.3
  Top Layer w0.254: R29.2 v1(199.136,120.904)
  Bottom Layer w0.254: C31.1 v1(199.136,120.904) 206.502,128.27 211.582,128.27 212.344,129.032 212.344,130.556 P13.5
"M3 PWM": P12.5 U2.39 | length 22.7
  Top Layer w0.254: P12.5@122.047,131.699 122.047,132.207 123.086,133.246 138.089,133.246 138.48,132.855 U2.39
"M3 S": R11.2 R30.1 R35.2 U4.1 | length 94.1
  Top Layer w0.254: R11.2 172.554,147.599 185.841,160.886 201.509,160.886 205.082,157.313 205.082,122.532 201.422,118.872 v1(199.136,118.872) R30.1 196.85,118.618 U4.1
  Bottom Layer w0.254: R35.2 v1(199.136,118.872)
"M3 VOL": C29.1 P13.6 R27.2 | length 19.5
  Top Layer w0.254: R27.2 v1(199.136,122.936)
  Bottom Layer w0.254: C29.1 v1(199.136,122.936) 205.74,129.54 P13.6
"M4 CUR": C32.1 P13.7 R31.2 | length 32.8
  Top Layer w0.254: R31.2 v1(199.136,103.632)
  Bottom Layer w0.254: C32.1 v1(199.136,103.632) 199.713,104.209 199.713,115.893 P13.7
"M4 PWM": P12.7 U2.40 | length 24.3
  Top Layer w0.254: P12.7@122.047,126.873 128.016,132.842 137.922,132.842 138.409,132.355 U2.40
"M4 S": R12.2 R32.1 R36.2 U4.7 | length 105.5
  Top Layer w0.254: R12.2 174.015,149.631 185.674,161.29 201.676,161.29 205.486,157.48 205.486,112.014 v1(199.136,105.664) R32.1 195.58,106.934 U4.7
  Bottom Layer w0.254: R36.2 v1(199.136,105.664)
"M4 VOL": C30.1 P13.8 R28.2 | length 32.3
  Top Layer w0.254: R28.2 v2(199.136,101.6)
  Bottom Layer w0.254: C30.1 v2(199.136,101.6) 200.117,102.581 200.117,113.757 P13.8
NetC9_1: C9.1 U2.5 Y1.1 | length 14.4
  Top Layer w0.254: U2.5 158.443,130.355 v2(161.036,127.762) 164.094,127.762 Y1.1
  Bottom Layer w0.254: v2(161.036,127.762) C9.1
NetC10_1: C10.1 R13.2 Y1.2 | length 11.2
  Top Layer w0.254: R13.2 174.274,127.792 Y1.2 v2(177.8,127.762)
  Bottom Layer w0.254: C10.1 v2(177.8,127.762)
NetC11_1: C11.1 SW1.1 U2.7 | length 23.3
  Top Layer w0.254: U2.7 161.698,131.355 165.242,134.899 173.654,134.899 175.544,134.899 C11.1
NetC12_1: C12.1 U2.3 Y2.2 | length 10.8
  Top Layer w0.254: U2.3 156.903,129.355 158.916,127.342 Y2.2
  Bottom Layer w0.254: Y2.2 160.911,122.936 C12.1
NetC13_1: C13.1 U2.4 Y2.1 | length 9.8
  Top Layer w0.254: U2.4 157.228,129.855 160.441,126.642 Y2.1
  Bottom Layer w0.254: Y2.1 162.523,124.931 C13.1
NetC25_1: C25.1 C26.1 C27.1 D1.2 R24.2 U3.8 U4.8 | length 61.3
  Top Layer w0.254: C27.1 v1(192.278,132.334) ; R24.2 v1(192.278,132.334) ; U3.8 197.358,146.304 v1(197.358,148.082) ; U4.8 197.866,110.236 v1(197.866,112.014) ; D1.2 201.93,129.54 195.072,129.54 v1(192.278,132.334)
  Bottom Layer w0.254: v1(197.358,148.082) C25.1 195.58,142.759 195.557,142.736 195.557,141.236 195.58,141.213 195.58,140.727 195.557,140.704 195.557,139.204 195.58,139.181 195.58,138.695 195.557,138.672 195.557,137.172 195.58,137.149 195.58,123.709 195.557,123.686 195.557,122.186 195.58,122.163 195.58,121.677 195.557,121.654 195.557,120.154 195.58,120.131 195.58,119.645 195.557,119.622 195.557,118.122 195.58,118.099 195.58,112.522 C26.1 v1(197.866,112.014)
  other v1: 195.58,129.54
NetC41_1: C41.1 C43.1 D6.2 U6.1 | length 36.5
  Top Layer w2: 166.497,76.581 169.037,79.121 184.277,79.121 ; C43.1 184.277,79.121 ; D6.2@198.12,79.121 184.277,79.121
NetC45_1: C45.1 C47.1 D9.2 U7.1 | length 37.1
  Top Layer w2: 166.497,92.456 169.037,94.996 184.277,94.996 ; C47.1 184.277,94.996 ; D9.2@198.247,93.726 196.977,94.996 184.277,94.996
NetD8_2: D8.2 L5.2 U6.2 | length 8.2
  Top Layer w1: D8.2 U6.2@167.002,74.041
  Top Layer w2: L5.2 D8.2
NetD11_2: D11.2 L6.2 U7.2 | length 8.2
  Top Layer w1: D11.2 U7.2@167.002,89.916
  Top Layer w2: L6.2 D11.2
NetF1_1: F1.1 J8.2 | length 13.7
  Top Layer w2: F1.1@203.454,79.502 203.454,73.914 203.962,73.406 J8.2
NetLED1_1: LED1.1 R73.1 | length 2.5
  Top Layer w0.254: LED1.1@118.961,74.293 119.126,74.458 R73.1
NetLED2_1: LED2.1 R74.1 | length 3.3
  Top Layer w0.254: LED2.1 211.074,83.094 R74.1
NetLED3_1: LED3.1 R75.1 | length 2.6
  Top Layer w0.254: LED3.1@118.961,91.692 119.126,91.857 R75.1
NetP9_1: P9.1 R8.2 | length 3.1
  Top Layer w0.254: R8.2 153.7,151.155 P9.1
NetP9_2: P9.2 R7.2 | length 2.9
  Top Layer w0.254: R7.2 151.16,150.647 P9.2
NetP9_3: P9.3 R6.2 | length 2.9
  Top Layer w0.254: P9.3 148.62,150.647 R6.2
NetP9_4: P9.4 R5.2 | length 3.1
  Top Layer w0.254: P9.4 146.08,151.155 R5.2
NetR13_1: R13.1 U2.6 | length 16.5
  Top Layer w0.254: U2.6 170.992,130.855 R13.1
NetR14_1: R14.1 R20.2 U3.3 | length 10.3
  Top Layer w0.254: R20.2 192.786,158.496 ; U3.3 193.802,152.146 192.786,153.162 192.786,158.496 ; R14.1 192.786,158.496
NetR15_1: R15.1 R21.2 U3.5 | length 9.9
  Top Layer w0.254: U3.5 192.532,138.43 R21.2 R15.1
NetR16_1: R16.1 R17.2 U3.2 | length 6
  Top Layer w0.254: R16.1 R17.2 195.072,153.416 U3.2
NetR18_1: R18.1 R19.2 U3.6 | length 5.5
  Top Layer w0.254: U3.6 193.802,140.462 R18.1
NetR24_1: R24.1 R25.2 U5.1 U5.2 | length 9.1
  Top Layer w0.254: v1(189.738,125.222) U5.1 ; U5.2 U5.1 ; R24.1 190.5,128.778 U5.1
  Bottom Layer w0.254: v1(189.738,125.222) R25.2
NetR27_1: R27.1 R33.2 U4.3 | length 11.4
  Top Layer w0.254: U4.3 194.31,116.84 192.024,119.126 R33.2 R27.1
NetR28_1: R28.1 R34.2 U4.5 | length 10.2
  Top Layer w0.254: U4.5 193.04,102.362 R34.2 R28.1
NetR29_1: R29.1 R30.2 U4.2 | length 6.6
  Top Layer w0.254: R29.1 R30.2 195.58,117.602 U4.2
NetR31_1: R31.1 R32.2 U4.6 | length 5.7
  Top Layer w0.254: U4.6 194.31,103.886 R31.1
SPI1_MISO: P6.6 U2.22 | length 25.2
  Top Layer w0.254: U2.22 151.013,141.754 160.042,150.783 160.042,156.735 P6.6
SPI1_MOSI: P6.7 U2.23 | length 24.3
  Top Layer w0.254: U2.23 150.513,141.961 159.542,150.99 P6.7
SPI1_NSS: P6.4 U2.20 | length 28
  Top Layer w0.254: U2.20 152.013,141.34 161.042,150.369 161.042,154.687 163.606,157.251 165.638,157.251 P6.4
SPI1_SCK: P6.5 U2.21 | length 26.1
  Top Layer w0.254: U2.21 151.513,141.547 160.542,150.576 160.542,154.949 164.368,158.775 P6.5
SPI2_MISO: P7.6 U2.35 | length 19.2
  Top Layer w0.254: P7.6 131.356,146.075 142.576,134.855 U2.35
SPI2_MOSI: P7.7 U2.36 | length 18.4
  Top Layer w0.254: P7.7 133.325,143.535 142.505,134.355 U2.36
SPI2_NSS: P7.4 U2.33 | length 21.9
  Top Layer w0.254: P7.4 132.11,148.107 132.11,146.464 142.719,135.855 U2.33
SPI2_SCK: P7.5 U2.34 | length 20.1
  Top Layer w0.254: P7.5 129.388,148.615 142.648,135.355 U2.34
SPI3_MISO: U1.2 U2.56 | length 14.7
  Top Layer w0.254: U1.2@146.74,112.471 146.74,115.747 148.59,117.597 148.59,122.106 149.513,123.029 U2.56
SPI3_MOSI: U1.5 U2.57 | length 6.3
  Top Layer w0.254: U1.5@149.204,120.04 149.204,122.149 150.013,122.957 U2.57
SPI3_NSS: U1.1 U2.50 | length 17
  Top Layer w0.254: v1(142.016,120.675) 146.513,125.172 U2.50 ; v1(143.54,119.405) 145.47,117.475 U1.1@145.47,112.471
  Bottom Layer w0.254: v1(142.016,120.675) 142.27,120.675 v1(143.54,119.405)
SPI3_SCK: U1.6 U2.55 | length 6.4
  Top Layer w0.254: U1.6@147.934,120.04 147.934,122.021 149.013,123.1 U2.55
SWCLK: P8.5 U2.49 | length 15
  Top Layer w0.254: P8.5 142.52,126.005 U2.49
SWDIO: P8.4 U2.46 | length 14.5
  Top Layer w0.254: P8.4 138.968,124.993 138.968,127.587 140.736,129.355 U2.46
TIM4_CH3: P11.1 U2.61 | length 26.4
  Top Layer w0.254: U2.61 152.013,124.185 151.957,124.129 151.957,108.503 158.018,102.442 P11.1
TIM4_CH4: P11.2 U2.62 | length 28.1
  Top Layer w0.254: U2.62 152.513,108.654 156.748,104.419 158.272,104.419 P11.2
UART4_RX: P3.4 U2.52 | length 21.7
  Top Layer w0.254: P3.4 136.782,112.139 136.782,113.717 147.513,124.449 U2.52
UART4_TX: P3.5 U2.51 | length 19.1
  Top Layer w0.254: P3.5 134.65,112.293 147.013,124.656 U2.51
USART1_RX: P1.4 U2.43 | length 32.9
  Top Layer w0.254: P1.4 131.602,112.293 131.602,128.549 133.908,130.855 U2.43
USART1_TX: P1.5 U2.42 | length 30.9
  Top Layer w0.254: P1.5 131.198,114.429 131.198,128.852 133.701,131.355 U2.42
USART2_RX: P2.4 U2.17 | length 26.1
  Top Layer w0.254: U2.17 153.513,139.146 154.023,139.656 154.023,141.572 163.098,150.647 163.098,154.965 164.368,156.235 165.384,156.235 P2.4
USART2_TX: P2.5 U2.16 | length 22.6
  Top Layer w0.254: U2.16 155.863,142.65 164.622,151.409 P2.5
  Bottom Layer w0.254: P2.5@164.622,154.076 P2.5
VCC_3.3V: C14.2 C15.2 C16.2 C17.2 C18.2 C19.2 C20.2 C42.1 C44.1 D7.2 J5.1 L5.1 P1.2 P2.2 P3.2 P4.2 P5.2 P6.2 P7.2 P8.2 R1.2 R2.2 R3.2 R4.2 R73.2 U1.3 U1.7 U1.8 U2.1 U2.13 U2.19 U2.32 U2.48 U2.64 U6.4 | length 353.2
  Top Layer w0.254: R73.2 121.412,75.311 J5.1@123.825,72.898 ; 133.477,72.898 135.399,70.976 166.692,70.976 U6.4 ; P5.2 140.492,150.901 v1(140.492,149.631) ; U2.48 143.723,128.295 v1(146.334,128.295) ; U1.8@145.394,120.04 v1(146.029,120.04) U1.7@146.664,120.04 ; P4.2 145.572,102.895 148.01,105.333 148.01,105.587 ; v1(145.826,135.407) 145.826,138.018 U2.32 ; U1.3@148.01,112.471 148.01,105.587 ; v1(149.636,107.213) 148.01,105.587 ; v1(152.43,136.677) 152.45,136.697 152.45,138.142 U2.19 ; 153.162,133.858 153.695,134.391 155.827,134.391 U2.13 ; v1(153.192,128.803) 153.513,128.482 ; U2.64 153.513,128.482 ; U2.1 153.64,128.355 153.513,128.482
  Top Layer w0.5: J5.1 123.952,78.232 117.094,85.09 117.094,94.488 127.279,104.673 P1.2
  Top Layer w2: J5.1@123.571,72.898 123.825,72.898 J5.1 133.477,72.898 C42.1 141.224,74.041 L5.1
  Bottom Layer w0.254: R4.2 v1(140.492,149.631) R3.2 ; C20.2 v1(146.334,128.295) ; P4.2 143.032,104.673 P3.2 P1.2 128.196,104.673 126.926,105.943 126.926,118.031 P8.2 136.024,127.129 136.024,132.318 127.18,141.162 127.18,154.353 P7.2 P5.2 139.58,160.657 169.852,160.657 171.734,158.775 P6.2 P2.2 170.21,152.425 164.114,152.425 155.986,144.297 155.986,139.217 C15.2 v1(152.43,136.677) 151.16,135.407 v1(145.826,135.407) ; C19.2 v1(145.826,135.407) ; v1(146.029,120.04) 146.029,112.09 v1(147.858,110.261) ; v1(149.636,107.213) 150.652,107.213 R1.2 R2.2 ; C16.2 153.446,134.391 153.446,129.057 v1(153.192,128.803) ; C17.2 153.7,128.295 v1(153.192,128.803) ; v1(145.826,135.407) 146.334,134.899 v1(146.334,128.295) ; v1(146.334,128.295) 152.684,128.295 v1(153.192,128.803)
  other v1: 153.416,134.112
VCC_5V: C46.1 C48.1 D10.2 J11.1 L6.1 P1.1 P2.1 P3.1 P4.1 P5.1 P6.1 P7.1 P8.1 R75.2 U7.4 | length 209.9
  Top Layer w0.254: R75.2 121.412,92.075 J11.1@123.825,89.662 ; 133.477,89.916 134.112,89.916 134.62,89.916 135.382,89.916 138.557,86.741 166.802,86.741 U7.4
  Top Layer w0.5: 134.112,89.916 134.396,90.2 P3.1
  Top Layer w2: J11.1@123.571,89.916 J11.1 C48.1 133.477,89.916 ; 134.62,89.916 C46.1 141.224,89.916 L6.1
  Bottom Layer w0.254: P4.1 P3.1 P1.1 126.522,104.673 126.522,120.167 P8.1 135.62,129.265 135.62,132.151 126.776,140.995 126.776,157.759 127.792,158.775 P7.1 P5.1 137.444,161.061 172.496,161.061 P6.1 P2.1
VCC_12V: D1.1 D6.1 D9.1 F1.2 P15.1 P15.2 P15.3 P15.4 R74.2 | length 86.8
  Top Layer w0.254: F1.2@203.2,88.392 203.454,88.646 R74.2
  Top Layer w0.5: F1.2@202.184,94.234 203.454,94.234 207.264,98.044 D1.1
  Top Layer w2: D6.1@198.247,84.836 D9.1@198.247,88.646 ; D9.1 F1.2@203.2,88.392 ; F1.2@203.454,94.234 203.454,88.646 210.82,96.012 P15.4 P15.3 P15.2 P15.1
VOLREF_1.5V: C28.1 R20.1 R21.1 R25.1 R26.2 R33.1 R34.1 | length 71.4
  Top Layer w0.254: v1(187.452,101.6) R34.1 ; v1(187.452,122.936) R33.1 ; v1(187.452,137.922) R21.1 ; v1(187.452,158.496) R20.1
  Bottom Layer w0.254: v1(187.452,101.6) v1(187.452,122.936) 188.722,124.206 188.722,129.032 ; v1(187.452,158.496) v1(187.452,137.922) 188.722,136.652 188.722,129.032 ; R26.2 188.722,129.032 ; C28.1 R25.1 188.722,129.032

## Polygon pours and split planes (outlines as drawn)
GND on Top Layer "Bottom Layer-No Net" (solid, pour order 8): 115.824,64.516 215.9,64.516 215.9,97.536 215.646,97.282 115.824,97.282
GND on Top Layer "Bottom Layer-No Net" (solid, pour order 10): 182.88,99.06 208.026,99.06 208.28,99.314 208.28,113.792 208.788,114.3 215.9,114.3 215.9,164.084 182.88,164.084
GND on Top Layer "Bottom Layer-No Net" (solid, pour order 12): 115.824,114.3 124.46,114.3 124.46,99.06 181.102,99.06 181.102,164.084 115.824,164.084
GND on Bottom Layer "Bottom Layer-No Net" (solid, pour order 7): 115.824,64.516 215.9,64.516 215.9,97.536 215.646,97.282 115.824,97.282
GND on Bottom Layer "Bottom Layer-No Net" (solid, pour order 9): 182.88,99.06 208.026,99.06 208.28,99.314 208.28,113.792 208.788,114.3 215.9,114.3 215.9,164.084 182.88,164.084
GND on Bottom Layer "Bottom Layer-No Net" (solid, pour order 11): 115.824,114.554 124.46,114.554 124.46,99.314 181.102,99.314 181.102,164.338 115.824,164.338

## Keep-outs
Keep-Out Layer:
  the board outline again, w0.5

## Silkscreen, mask and mechanical layers (free items; w line width, h text height)
Top Overlay:
  lines w0.254: 154.686,114.3 185.928,114.3 185.928,122.682 154.686,122.682 154.686,114.3
  text "SPI1" at 176.276,162.306 h1 r180
  text "SPI2" at 125.73,160.02 h1 r270
  text "IIC2" at 131.826,160.02 h1 r270
  text "AIN8" at 146.812,155.194 h1 r90
  text "AIN9" at 149.352,155.194 h1 r90
  text "AIN14" at 151.892,155.194 h1 r90
  text "AIN15" at 154.432,155.194 h1 r90
  text "USART2" at 176.022,152.654 h1 r180
  text "SWDIO" at 136.144,129.286 h1 r270
  text "Smart Vehicle Control" at 155.448,120.396 h1.52
  text "Designed by ElsonLuo" at 155.448,117.856 h1.52
  text "2014.10.26" at 155.448,115.062 h1.52
  text "V1.1" at 179.832,115.062 h1.52
  text "PD2" at 177.546,111.252 h1
  text "PC13" at 177.546,108.712 h1
  text "PC12" at 177.546,106.172 h1
  text "PB2" at 177.546,103.632 h1
  text "PWM" at 162.56,101.346 h1
  text "USART1" at 127.254,101.092 h1 r90
  text "PA8" at 177.546,101.092 h1
  text "USART4" at 137.414,100.838 h1 r90